# Altium PCB PCB1.PcbDoc
Units mm, origin at the board's own origin, x right, y up, seen from the top; angles counter-clockwise.
Board outline 186.79 x 62.12 mm, 2 copper layers (Top Layer, Bottom Layer); 22 components, 77 nets, 215 pads, 50 vias.
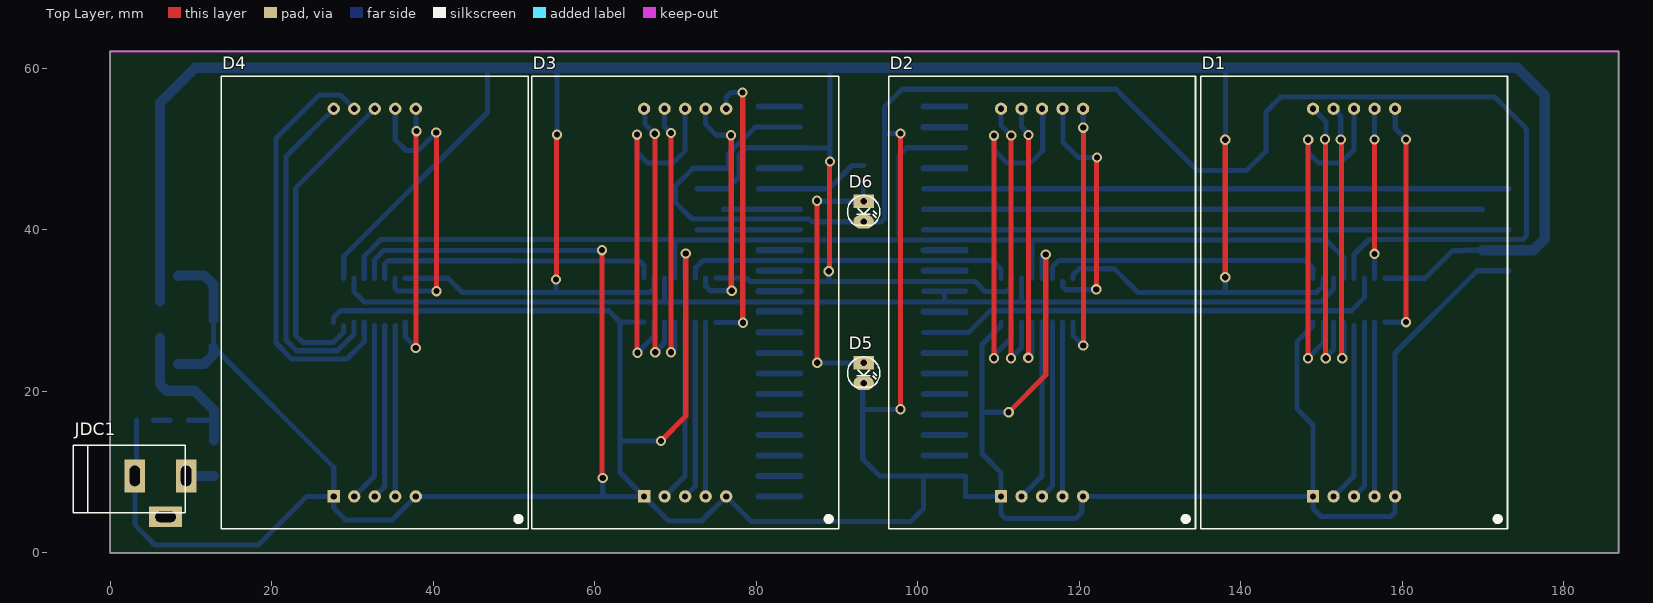
[diagram p0: Top Layer view]
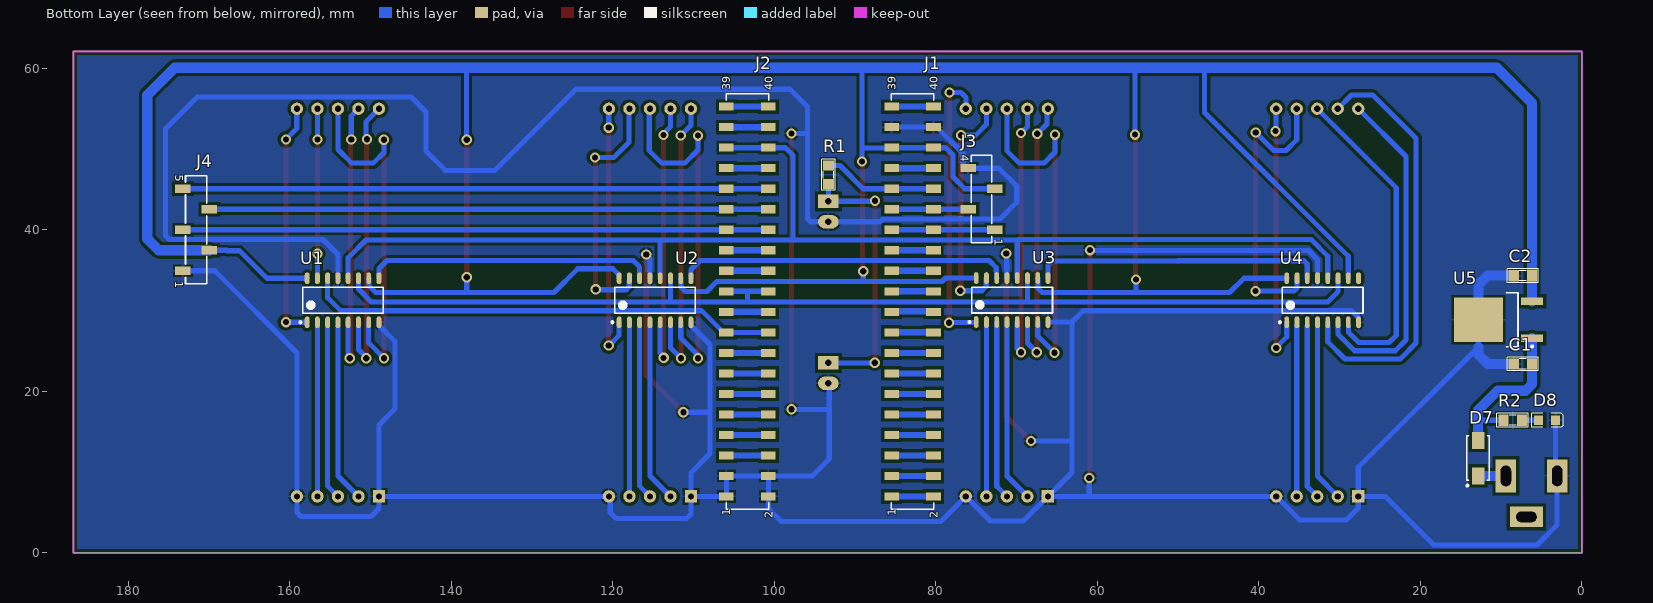
[diagram p1: Bottom Layer view, seen from below]
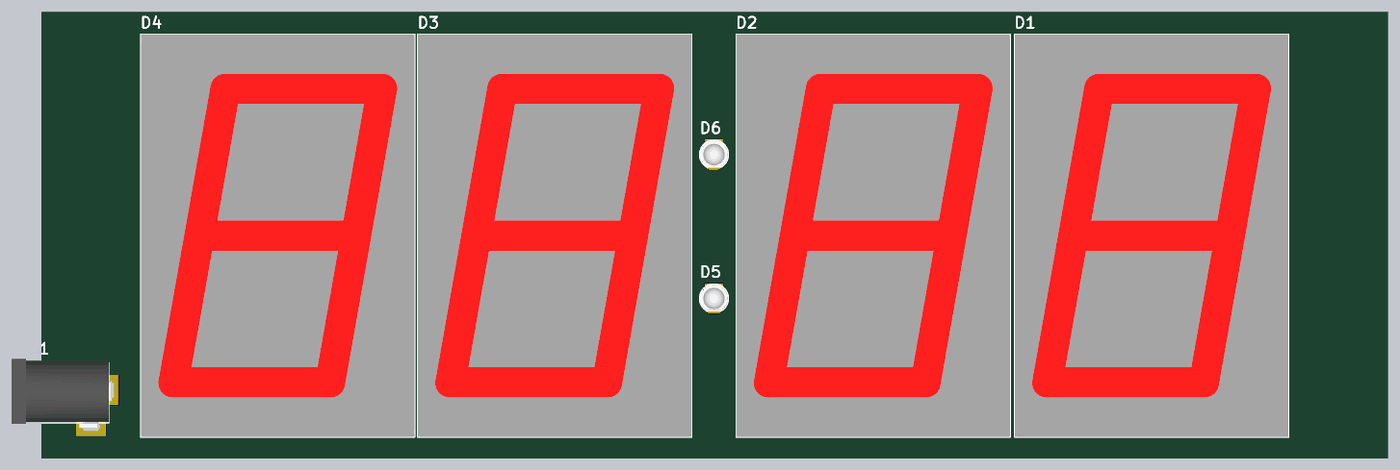
[diagram p2: 3D render of the assembled board from above, using the file's embedded part models]
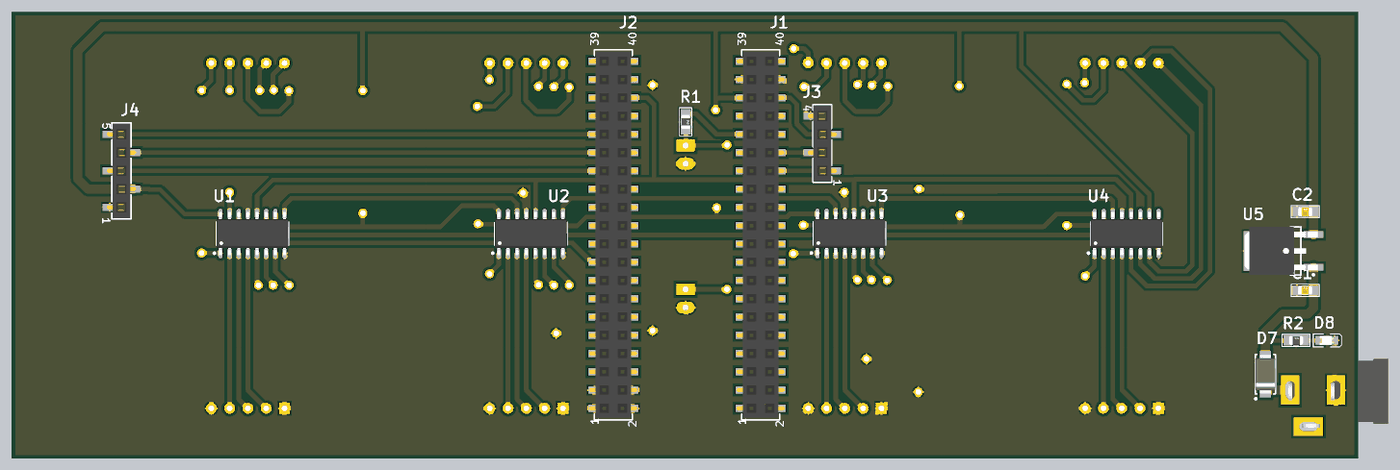
[diagram p3: 3D render of the assembled board from below, using the file's embedded part models]

## Layer stack, top to bottom
Top Solder: solder mask 0.0102, Solder Resist, Dk 3.5
Top Layer: signal copper 0.0356
Dielectric 1: dielectric 0.32, FR-4, Dk 4.8
Bottom Layer: signal copper 0.0356
Bottom Solder: solder mask 0.0102, Solder Resist, Dk 3.5

## Board outline
0,0 186.792,0 186.792,62.115 0,62.115

## Design rules (kind name [scope] priority, off if disabled: settings)
Clearance [All] p1: gap=0.381 ignorepadtopadclearanceinfootprint=FALSE
PolygonConnect [All] p1: connectstyle=Relief reliefconductorwidth=0.254 reliefentries=4 polygonreliefangle="90 Angle" airgapwidth=0.254
RoutingVias [All] p1: holewidth=0.762 width=1.27 viastyle="Through Hole" minholewidth=0.762 minwidth=1.27 maxholewidth=0.762 maxwidth=1.27
SolderMaskExpansion [All] p1: expansion=0.102 istentingtop=FALSE
Width [All] p1: maxlimit=1.27 minlimit=0.508 preferedwidth=0.762
30 further rules are at their usual default settings.

## Classes and differential pairs
component class Power_Supply: C1 C2 D7 D8 JDC1 R2 U5
component class Peripherials: D1 D2 D3 D4 D5 D6 J3 J4 R1 U1 U2 U3 U4
component class MCU: J1 J2

## Components (designator, comment, footprint, x,y, rotation, side; value= is the part's Value field where it differs from the comment)
C1 "Cap Non-Pol SMD" CAP-SM-0805 8.445,23.405 r180 bottom value=0.33uF/16V/0805
C2 "Cap Non-Pol SMD" CAP-SM-0805 8.445,34.327 r180 bottom value=0.1uF/16V/0805
D1 "7-SEGMENT DISPLAY" "7-SEGMENT 1.8INCH" 154.026,31 r0 top
D2 "7-SEGMENT DISPLAY" "7-SEGMENT 1.8INCH" 115.392,31 r0 top
D3 "7-SEGMENT DISPLAY" "7-SEGMENT 1.8INCH" 71.196,31 r0 top
D4 "7-SEGMENT DISPLAY" "7-SEGMENT 1.8INCH" 32.766,31 r0 top
D5 "LED" LED-3mm 93.293,23.54 r270 top
D6 "LED" LED-3mm 93.292,43.54 r270 top
D7 "D Schottky" SS34 12.852,11.737 r90 bottom
D8 "LED SMD" LED_0805_Blue 4.305,16.433 r180 bottom
J1 "61004021821" 61004021821 82.877,31.127 r90 bottom
J2 "61004021821" 61004021821 103.317,31.127 r90 bottom
J3 "61000413321" 61000413321 74.32,43.827 r270 bottom
J4 "61000511921" 61000511921 171.577,40.017 r270 bottom
JDC1 "Jack DC" DC-IN 6.229,6.997 r0 top value="Jac DC"
R1 "RESISTOR SMD" RES-SM-0805 93.269,47.958 r270 bottom value=1K
R2 "RESISTOR SMD" RES-SM-0805 9.702,16.437 r180 bottom value=10K
U1 "74HC595" SOIC-16 157.836,28.562 r90 bottom
U2 "74HC595" SOIC-16 119.202,28.562 r90 bottom
U3 "74HC595" SOIC-16 74.993,28.587 r90 bottom
U4 "74HC595" SOIC-16 36.538,28.562 r90 bottom
U5 "LM78xx" DPAK228P1014X239-3N 10.359,28.872 r0 bottom

## Footprints (in the part's own frame and the unit in brackets; to place one, negate y for a bottom-side part, rotate by r counter-clockwise, add the part's x,y. Pads: shape width x height; smd on the part's side, far side on the other; paste and mask are expansions set on the pad)
"7-SEGMENT 1.8INCH" [mil] "38x56x11mm"
  rect 60x60 hole 30: 1(-200,-944.88)
  round 60 hole 30: 2(-100,-944.88) 3(0,-944.88) 4(100,-944.88) 5(200,-944.88) 6(200,944.88) 7(100,944.88) 8(0,944.88) 9(-100,944.88) 10(-200,944.88)
  silkscreen extent -748,-1102 748,1102, body extent -748,-1102 748,1102, height 476
61000413321 [mm] "Socket Header, Pitch 2.54 mm, SMT, Vertical, single row, 4p"
  rect 1x1.91 smd: 1(3.81,1.645) 2(1.27,-1.645) 3(-1.27,1.645) 4(-3.81,-1.645)
  silkscreen extent -5.41,-1.28 5.41,1.28, body extent -5.33,-2.02 5.33,2.03, height 7.5
61000511921 [mm] "Socket Header, Pitch 2.54 mm, SMT, Vertical, single row, 5p"
  rect 1x1.91 smd: 1(5.08,-1.645) 2(2.54,1.645) 3(0,-1.645) 4(-2.54,1.645) 5(-5.08,-1.645)
  silkscreen extent -6.68,-1.33 6.68,1.33, body extent -6.6,-2.02 6.6,2.03, height 7.5
61004021821 [mm] "Socket Header, Pitch 2.54 mm, SMT, Vertical, dual row, 40p"
  rect 1x1.8 smd: 1(-24.13,2.6) 2(-24.13,-2.6) 3(-21.59,2.6) 4(-21.59,-2.6) 5(-19.05,2.6) 6(-19.05,-2.6) 7(-16.51,2.6) 8(-16.51,-2.6) 9(-13.97,2.6) 10(-13.97,-2.6) 11(-11.43,2.6) 12(-11.43,-2.6) 13(-8.89,2.6) 14(-8.89,-2.6) 15(-6.35,2.6) 16(-6.35,-2.6) 17(-3.81,2.6) 18(-3.81,-2.6) 19(-1.27,2.6) 20(-1.27,-2.6) 21(1.27,2.6) 22(1.27,-2.6) 23(3.81,2.6) 24(3.81,-2.6) 25(6.35,2.6) 26(6.35,-2.6) 27(8.89,2.6) 28(8.89,-2.6) 29(11.43,2.6) 30(11.43,-2.6) 31(13.97,2.6) 32(13.97,-2.6) 33(16.51,2.6) 34(16.51,-2.6) 35(19.05,2.6) 36(19.05,-2.6) 37(21.59,2.6) 38(21.59,-2.6) 39(24.13,2.6) 40(24.13,-2.6)
  silkscreen extent -25.73,-2.62 25.73,2.62, body extent -25.4,-3.35 25.4,3.35, height 7.5
CAP-SM-0805 [mil]
  rect 50x55 smd: 1(0,0) 2(90,0)
  silkscreen extent -32,-34 121,33, body extent 6,-25 84,25, height 31
DC-IN [mil] "Jac DC input"
  rect 100x160 hole 50 slot 100 at 90 deg: 1(125,100) 2(-125,100)
  rect 160x100 hole 50 slot 100 at 0 deg: 3(25,-100)
  silkscreen extent -425,-80 120,250, body extent -410,-105 134,269, height 434
DPAK228P1014X239-3N [mm] "D-PAK, 3-Pads, Body 6.21x6.72mm (max), IPC Medium Density"
  rect 2.7x0.95 smd: 1(-4.2,2.28) 3(-4.2,-2.28)
  rect 6.1x5.55 smd: 2(2.45,0)
  silkscreen extent -4.32,-3.35 -1,3.43, body extent -4.79,-3.35 5.35,3.35, height 2.39
LED-3mm [mil] "LED 2 PIN, 3ly Only colour"
  rect 65x100 hole 32: 1(0,0)
  oval 65x100 hole 32: 2(100,0)
  silkscreen extent -29,-78 118,79, body extent -25,-75 113,75, height 217
LED_0805_Blue [mm] "Chip LED, 2-Leads, Body 2.0x1.3mm, IPC Medium Density"
  rect 1.1x1.2 smd: 1(-1.05,0) 2(1.05,0)
  silkscreen extent -1.91,-0.89 2.03,0.89, body extent -1,-0.63 1,0.62, height 0.68
RES-SM-0805 [mil]
  rect 50x55 smd: 1(0,0) 2(90,0)
  silkscreen extent -32,-34 121,33, body extent 6,-25 84,25, height 31
SOIC-16 [mm]
  oval 1.45x0.6 smd: 1(0,0) 2(0,-1.27) 3(0,-2.54) 4(0,-3.81) 5(0,-5.08) 6(0,-6.35) 7(0,-7.62) 8(0,-8.89) 9(5.45,-8.89) 10(5.45,-7.62) 11(5.45,-6.35) 12(5.45,-5.08) 13(5.45,-3.81) 14(5.45,-2.54) 15(5.45,-1.27) 16(5.45,0)
  silkscreen extent -0.12,-9.45 4.33,0.98, body extent -0.27,-9.45 5.72,0.56, height 1.75
SS34 [mm] "DO-214-AC/SMA Molded Diode, Body 5.3x2.6mm, IPC Medium Density"
  rect 2.1x1.55 smd: A(-2.2,0) K(2.2,0)
  silkscreen extent -3.52,-1.4 2.75,1.45, body extent -2.75,-1.4 2.75,1.4, height 2.3

## Part data
C1 C2: "Capacitor"
D1 D2 D3 D4: library part 7-SEGMENT
D7: "Schottky Diode", Supplier Part Number 1=SS14, Code_JEDEC=DO-214-AA, LatestRevisionDate=17-Jul-2002, LatestRevisionNote="Re-released for DXP Platform.", PackageDescription="DO-214-AA/SMB; 2 C-Bend Leads; Body 5.3 x 3.6 mm, inc. leads (LxW)", PackageReference=SMB, Published=8-Jun-2000, Publisher="Altium Limited", Supplier 1="Arrow Electronics", Supplier 2=RSComponents, Supplier Part Number 2=8080433
D8: "LED"
J1 J2: "WR-PHD Socket Header, SMT, pitch 2.54mm, Dual Row, Vertical, 40p", Contact Resistance=20mOhm, Manufacturer="Wurth Elektronik", Operating Temperature="-40 to +105degC", Rated Current=3A, Withstanding Voltage=600VAC, Working Voltage=250VAC, ComponentLink1Description=Manufacturer, ComponentLink1URL=http://www.we-online.de, ComponentLink2Description=Datasheet, ComponentLink2URL=https://www.we-online.com/catalog/datasheet/61004021821.pdf, Gender="Socket Header", Manufacturer Part Number=61004021821, Mounting Technology=SMT, Orientation=Vertical, Packaging=Tube, Pin Number=40, Pitch=2.54mm, Published Date="May 2020", Row Number=Dual
J3: "WR-PHD Socket Header, SMT, pitch 2.54mm, Single Row, Vertical, 4p", Contact Resistance=20mOhm, Manufacturer="Wurth Elektronik", Operating Temperature="-40 to +125degC", Rated Current=3A, Withstanding Voltage=500VAC, Working Voltage=250VAC, ComponentLink1Description=Manufacturer, ComponentLink1URL=http://www.we-online.de, ComponentLink2Description=Datasheet, ComponentLink2URL=https://www.we-online.com/catalog/datasheet/61000413321.pdf, Gender="Socket Header", Manufacturer Part Number=61000413321, Mounting Technology=SMT, Orientation=Vertical, Packaging=Tube, Pin Number=4, Pitch=2.54mm, Published Date="May 2020", Row Number=Single
J4: "WR-PHD Socket Header, SMT, pitch 2.54mm, Single Row, Vertical, 5p", Contact Resistance=20mOhm, Manufacturer="Wurth Elektronik", Operating Temperature="-40 to +125degC", Rated Current=3A, Withstanding Voltage=500VAC, Working Voltage=250VAC, ComponentLink1Description=Manufacturer, ComponentLink1URL=http://www.we-online.de, ComponentLink2Description=Datasheet, ComponentLink2URL=https://www.we-online.com/catalog/datasheet/61000511921.pdf, Gender="Socket Header", Manufacturer Part Number=61000511921, Mounting Technology=SMT, Orientation=Vertical, Packaging=Tube, Pin Number=5, Pitch=2.54mm, Published Date="May 2020", Row Number=Single
JDC1: "Jack DC input"
R1 R2: "Resistor"
U1 U2 U3 U4: "8-Bit Serial-Input/Serial orParallel-Output ShiftRegister with Latched3-State Outputs"

## Via types
v1: diameter 1.27, hole 0.762, Top Layer to Bottom Layer, 50 vias

## Nets (pads, with @x,y where several pads share a name; then routed paths per layer and width w, separated by ;. In a path a pad name is that pad's centre, name@x,y a point inside that pad or via, vN(x,y) a via of type N, cw(c..) or ccw(c..) an arc to the next point about the centre after c; other vN are vias at no path point)
+5: C2.2 J1.35 J1.36 J3.3 J4.2 U1.10 U1.16 U2.10 U2.16 U3.10 U3.16 U4.10 U4.16 U5.3 | length 480.8
  Top Layer w0.635: v1(55.22,33.861) 55.27,33.911 55.27,51.743 v1(55.32,51.793) ; v1(88.975,34.874) 89.052,34.95 89.052,48.39 v1(89.128,48.466) ; v1(138.074,34.14) v1(138.074,51.158) v1@138.074,51.565
  Bottom Layer w0.635: U4.10 28.918,36.745 46.71,54.537 46.71,60.074 ; U4.16 41.835,34.012 43.611,32.235 55.219,32.235 ; v1(55.22,33.861) 55.219,32.235 ; v1(55.32,51.793) 55.32,60.048 55.346,60.074 ; U3.10 67.356,34.02 67.356,32.765 66.827,32.235 55.219,32.235 ; J3.3 76.412,45.097 77.876,46.561 77.876,49.279 78.774,50.177 J1.36 J1.35 J1.35@85.877,50.177 ; U3.16 78.789,34.037 79.23,33.596 88.975,33.596 ; J1.35@85.877,50.134 88.933,50.134 88.95,50.117 ; v1(88.975,34.874) 88.975,33.596 ; v1(89.128,48.466) 89.128,60.074 ; U2.10 111.565,33.994 111.565,32.921 111.006,32.362 108.339,32.362 107.106,33.596 88.975,33.596 ; U2.16 119.202,34.402 119.982,35.182 124.332,35.182 127.279,32.235 138.074,32.235 ; v1(138.074,34.14) 138.074,32.235 ; v1(138.074,51.158) 138.124,51.209 138.124,60.074 ; U1.10 150.198,33.994 150.198,33.082 149.351,32.235 138.074,32.235 ; U1.16 162.811,34.012 166.217,37.417 167.725,37.417 167.785,37.477 J4.2
  Bottom Layer w1.27: U5.3 C2.2 6.159,55.692 10.541,60.074 46.71,60.074 55.346,60.074 89.128,60.074 138.124,60.074 174.243,60.074 177.621,56.696 177.621,38.889 176.209,37.477 J4.2
DS_2: U1.9 U2.14 | length 35.6
  Bottom Layer w0.635: U2.14 116.662,35.407 117.462,36.207 147.945,36.207 148.946,35.206 U1.9
DS_3: U2.9 U3.14 | length 41
  Bottom Layer w0.635: U3.14 72.471,34.055 72.471,34.904 72.504,34.937 72.504,35.318 73.393,36.207 109.207,36.207 110.312,35.102 U2.9
DS_4: U3.9 U4.14 | length 35.9
  Bottom Layer w0.635: U4.14 33.998,35.788 34.383,36.172 49.968,36.172 49.981,36.16 65.567,36.16 66.103,35.623 U3.9
GND: C1.1 C2.1 D1.1 D1.5 D2.1 D2.5 D3.1 D3.5 D4.1 D4.5 D5.2 D6.2 D8.2 J1.37 J1.38 J2.1 J2.2 J2.3 J2.4 J3.4 J4.1 JDC1.2 U1.8 U1.13 U2.8 U2.13 U3.8 U3.13 U4.8 U4.13 U5.2 | length 758.5
  Top Layer w0.635: v1(60.909,37.493) 60.909,9.35 v1(60.985,9.274) ; v1(68.199,13.871) 71.272,16.945 v1(71.272,37.061) ; v1(97.866,17.783) v1(97.866,51.946) ; v1(111.252,17.427) 115.849,22.025 v1(115.849,36.96)
  Bottom Layer w0.635: D8.2 3.255,9.739 JDC1.2 3.054,3.477 5.537,0.993 18.339,0.993 24.345,7 D4.1 ; U5.2 12.809,25.494 27.686,10.618 D4.1 ; U4.8 27.665,28.579 27.665,29.146 28.504,29.985 61.746,29.985 63.144,28.587 ; U4.13 32.728,36.312 33.858,37.442 60.858,37.442 v1(60.909,37.493) ; v1(60.985,9.274) 60.985,7.025 60.96,7 ; U3.8 63.144,28.587 ; v1(68.199,13.871) 63.144,13.871 ; U3.13 71.201,34.055 71.201,36.99 v1(71.272,37.061) ; J1.37 J1.38 79.877,52.717 76.602,49.442 76.602,47.82 76.42,47.637 J3.4 72.196,47.637 69.977,45.418 69.977,43.411 72.034,41.354 86.528,41.354 86.882,41 95.513,41 95.885,41.372 95.885,51.946 ; D5.2 93.193,20.9 93.193,17.783 ; v1(97.866,17.783) 93.193,17.783 ; v1(97.866,51.946) 95.885,51.946 ; U2.8 110.312,28.172 107.95,25.809 107.95,17.503 ; v1(111.252,17.427) 108.026,17.427 107.95,17.503 ; U2.13 115.392,36.503 v1(115.849,36.96) ; U1.8 148.946,28.172 146.976,26.202 146.976,17.808 148.946,15.839 D1.1 ; U1.13 154.026,36.96 155.884,38.818 174.909,38.818 175.362,39.271 175.362,52.53 171.45,56.442 159.729,56.442 159.711,56.461 144.951,56.461 143.104,54.613 143.104,49.736 140.741,47.374 134.569,47.374 124.536,57.407 98.044,57.407 95.885,55.248 95.885,51.946 ; J4.1 169.275,34.937 159.106,24.768 D1.5 159.106,5.032 158.598,4.524 149.936,4.524 148.946,5.515 D1.1 ; D4.1 27.686,5.565 29.159,4.092 34.938,4.092 D4.5 60.96,7 ; 60.96,7 D3.1 ; 63.144,13.871 63.144,9.972 D3.1 ; 63.144,13.871 63.144,28.587 ; D3.1 69.176,3.94 73.216,3.94 D3.5 79.387,3.889 99.136,3.889 100.717,5.469 J2.2 J2.4 ; 93.193,17.783 93.193,11.636 95.292,9.537 J2.4 ; J2.4 J2.3 J2.1 105.918,6.999 110.311,6.999 D2.1 ; 107.95,17.503 107.95,12.296 110.312,9.934 D2.1 ; D2.1 110.312,4.829 110.896,4.245 119.532,4.245 120.302,5.014 120.302,6.83 D2.5 D1.1
  Bottom Layer w1.27: C1.1 11.642,23.405 12.809,24.572 12.809,25.494 ; C2.1 8.445,34.344 11.684,34.344 12.809,33.218 U5.2
I2C1_SCL: J1.29 J1.30 J3.2 | length 9.5
  Bottom Layer w0.635: J3.2 J1.30 J1.29
I2C1_SDA: J1.27 J1.28 J3.1 | length 12.8
  Bottom Layer w0.635: J3.1 J1.28 J1.27
LATCH: J2.35 J2.36 U1.12 U2.12 U3.12 U4.12 | length 157
  Bottom Layer w0.635: U4.12 31.458,36.745 33.54,38.827 69.825,38.827 69.913,38.738 ; U3.12 69.913,38.738 ; J2.35 101.042,50.177 J2.36 98.611,50.177 97.662,49.228 97.662,38.789 97.637,38.763 ; U2.12 114.122,38.747 ; U1.12 152.756,36.553 150.561,38.747 114.122,38.747 ; 69.913,38.738 69.939,38.763 97.637,38.763 ; 97.637,38.763 104.129,38.763 104.146,38.747 114.122,38.747
LED_BLINK: J1.31 J1.32 R1.1 | length 14.2
  Bottom Layer w0.635: J1.32 J1.31 89.011,45.097 91.872,47.958 R1.1
NetD1_2: D1.2 U1.4 | length 22.2
  Bottom Layer w0.635: D1.2 154.025,9.539 U1.4@154.025,28.154
NetD1_3: D1.3 U1.3 | length 22.1
  Bottom Layer w0.635: D1.3 155.296,8.27 U1.3
NetD1_4: D1.4 U1.2 | length 21.6
  Bottom Layer w0.635: D1.4 U1.2
NetD1_6: D1.6 U1.1 | length 29.6
  Top Layer w0.635: v1@160.451,28.578 v1(160.451,51.184)
  Bottom Layer w0.635: U1.1 157.844,28.57 160.444,28.57 v1(160.452,28.578) ; D1.6 159.118,54.988 159.118,52.545 160.451,51.212 v1(160.451,51.184)
NetD1_7: D1.7 U1.15 | length 21
  Top Layer w0.635: v1(156.566,37.035) v1@156.565,51.082
  Bottom Layer w0.635: U1.15 v1(156.566,37.035) ; v1@156.565,51.083 D1.7
  other v1: 156.565,51.184
NetD1_8: D1.8 U1.7 | length 45.9
  Top Layer w0.635: v1(148.31,24.107) 148.322,24.12 148.322,51.146 v1(148.335,51.158)
  Bottom Layer w0.635: v1(148.31,24.107) 150.216,26.013 U1.7 ; v1(148.335,51.158) 148.335,49.584 149.656,48.263 152.323,48.263 154.026,49.965 D1.8
NetD1_9: D1.9 U1.5 | length 35.7
  Top Layer w0.635: v1@152.374,50.879 152.463,50.79 152.463,24.272 v1@152.552,24.184
  Bottom Layer w0.635: D1.9 152.374,54.112 v1@152.374,50.879 ; v1@152.552,24.184 152.756,24.388 U1.5
  other v1: 152.552,24.107 152.374,51.184
NetD1_10: D1.10 U1.6 | length 36.4
  Top Layer w0.635: v1(150.419,51.232) 150.469,51.181 150.469,24.209 v1@150.52,24.158
  Bottom Layer w0.635: D1.10 150.545,53.401 150.545,52.766 150.54,52.761 150.54,51.353 v1(150.419,51.232) ; v1@150.52,24.158 150.52,24.234 151.486,25.2 U1.6
  other v1: 150.52,24.107
NetD2_2: D2.2 U2.4 | length 22.6
  Bottom Layer w0.635: D2.2 115.392,9.54 U2.4
NetD2_3: D2.3 U2.3 | length 22.2
  Bottom Layer w0.635: D2.3@115.391,7.115 115.507,7.115 116.662,8.27 U2.3 ; D2.3 D2.3@115.392,7.114
NetD2_4: D2.4 U2.2 | length 21.6
  Bottom Layer w0.635: D2.4 U2.2
NetD2_6: D2.6 U2.1 | length 32.8
  Top Layer w0.635: v1(120.497,25.682) 120.522,25.708 120.522,52.632 v1(120.497,52.657)
  Bottom Layer w0.635: U2.1 119.202,26.951 120.471,25.682 v1(120.497,25.682) ; D2.6 120.497,54.975 v1(120.497,52.657)
NetD2_7: D2.7 U2.15 | length 30.5
  Top Layer w0.635: v1(122.098,32.639) 122.148,32.689 122.148,48.924 v1(122.199,48.974)
  Bottom Layer w0.635: D2.7 117.982,54.95 117.982,50.853 119.862,48.974 v1(122.199,48.974) ; U2.15@117.95,33.604 117.95,32.96 118.322,32.588 122.047,32.588 v1(122.098,32.639)
NetD2_8: D2.8 U2.7 | length 47.2
  Top Layer w0.635: v1(109.448,24.107) v1(109.448,51.666)
  Bottom Layer w0.635: v1(109.448,24.107) 109.448,24.488 111.582,26.623 U2.7 ; v1(109.448,51.666) 109.448,49.888 111.073,48.263 113.918,48.263 115.468,49.812 115.468,54.925 D2.8
NetD2_9: D2.9 U2.5 | length 35.8
  Top Layer w0.635: v1(113.69,24.155) 113.716,24.181 v1(113.716,51.74)
  Bottom Layer w0.635: D2.9 112.852,52.775 113.716,51.912 v1(113.716,51.74) ; v1(113.69,24.155) 113.69,24.327 114.122,24.759 U2.5
NetD2_10: D2.10 U2.6 | length 36.4
  Top Layer w0.635: v1(111.556,24.107) 111.556,51.666 v1(111.581,51.692)
  Bottom Layer w0.635: D2.10 110.312,52.961 v1(111.581,51.692) ; v1(111.556,24.107) 112.852,25.404 U2.6
NetD3_2: D3.2 U3.4 | length 22.6
  Bottom Layer w0.635: D3.2 71.183,9.527 U3.4
NetD3_3: D3.3 U3.3 | length 22.1
  Bottom Layer w0.635: D3.3 72.453,8.257 U3.3
NetD3_4: D3.4 U3.2 | length 21.6
  Bottom Layer w0.635: D3.4 U3.2@73.736,28.587
NetD3_6: D3.6 U3.1 | length 35.6
  Top Layer w0.635: v1(78.283,57) 78.321,56.962 78.321,28.54 v1(78.359,28.502)
  Bottom Layer w0.635: U3.1 74.993,28.562 75.011,28.544 78.316,28.544 v1(78.359,28.502) ; D3.6 76.251,55.025 76.251,56.391 76.86,57 v1(78.283,57)
NetD3_7: D3.7 U3.15 | length 29.4
  Top Layer w0.635: v1(76.86,51.717) 76.91,51.666 76.91,32.515 v1(76.961,32.464)
  Bottom Layer w0.635: U3.15@73.73,34.043 U3.15 73.741,34.02 73.741,33.017 74.294,32.464 v1(76.961,32.464) ; D3.7 73.736,53.038 75.057,51.717 v1(76.86,51.717)
NetD3_8: D3.8 U3.7 | length 46.2
  Top Layer w0.635: v1(65.226,51.793) 65.226,24.869 v1(65.303,24.793)
  Bottom Layer w0.635: v1(65.226,51.793) 65.226,49.634 66.598,48.263 69.671,48.263 71.196,49.788 D3.8 ; v1(65.303,24.793) 67.373,26.864 U3.7
NetD3_9: D3.9 U3.5 | length 34.4
  Top Layer w0.635: v1(69.443,24.844) v1(69.443,51.997)
  Bottom Layer w0.635: D3.9 68.655,52.784 v1(69.443,51.997) ; v1(69.443,24.844) 69.913,25.315 U3.5
NetD3_10: D3.10 U3.6 | length 34.9
  Top Layer w0.635: v1(67.436,51.895) 67.462,51.87 67.462,24.869 v1(67.487,24.844)
  Bottom Layer w0.635: D3.10 66.218,54.899 66.218,53.114 v1(67.436,51.895) ; v1(67.487,24.844) 68.643,26 U3.6
NetD4_2: D4.2 U4.4 | length 22.2
  Bottom Layer w0.635: D4.2 32.745,9.519 U4.4@32.745,28.154
NetD4_3: D4.3 U4.3 | length 21.7
  Bottom Layer w0.635: D4.3 33.998,8.232 U4.3@33.998,28.154
NetD4_4: D4.4 U4.2 | length 21.2
  Bottom Layer w0.635: U4.2@35.285,28.154 35.306,28.134 D4.4
NetD4_6: D4.6 U4.1 | length 33.4
  Top Layer w0.635: v1(37.845,25.377) 37.883,25.415 37.883,52.187 v1(37.921,52.225)
  Bottom Layer w0.635: U4.1 36.538,26.764 37.845,25.457 v1(37.845,25.377) ; D4.6 37.884,54.962 37.884,52.263 v1(37.921,52.225)
NetD4_7: D4.7 U4.15 | length 36.6
  Top Layer w0.635: v1(40.385,52.073) 40.385,32.439 v1(40.411,32.413)
  Bottom Layer w0.635: U4.15 35.285,33.994 35.285,32.785 35.657,32.413 v1(40.411,32.413) ; D4.7 35.306,51.158 36.626,49.838 38.15,49.838 v1(40.385,52.073)
NetD4_8: D4.8 U4.7 | length 39.8
  Bottom Layer w0.635: U4.7@28.9,28.154 28.9,27.329 27.618,26.047 23.863,26.047 22.974,26.936 22.974,45.208 D4.8
NetD4_9: D4.9 U4.5 | length 53
  Bottom Layer w0.635: D4.9 28.533,56.693 25.883,56.693 20.523,51.333 20.523,25.984 22.492,24.015 29.32,24.015 31.458,26.153 U4.5
NetD4_10: D4.10 U4.6 | length 42.4
  Bottom Layer w0.635: D4.10 21.768,49.082 21.768,26.364 23.101,25.031 28.152,25.031 30.2,27.079 U4.6@30.2,28.562
NetD5_1: D5.1 D6.1 R1.2 | length 33.8
  Top Layer w0.635: v1(87.528,43.615) 87.541,43.602 87.541,23.561 v1(87.554,23.549)
  Bottom Layer w0.635: v1(87.528,43.615) 87.603,43.54 D6.1 93.269,43.563 R1.2 ; v1(87.554,23.549) 87.562,23.54 D5.1
NetD7_A: D7.A JDC1.1 | length 3.4
  Bottom Layer w1.27: JDC1.1 D7.A
NetD8_1: D8.1 R2.2 | length 2.1
  Bottom Layer w0.635: D8.1 5.357,16.435 7.414,16.435 R2.2
NetJ1_1: J1.1 J1.2 | length 5.2
  Bottom Layer w0.762: J1.2 J1.1
NetJ1_3: J1.3 J1.4 | length 5.2
  Bottom Layer w0.762: J1.4 J1.3
NetJ1_5: J1.5 J1.6 | length 5.2
  Bottom Layer w0.762: J1.6 J1.5
NetJ1_7: J1.7 J1.8 | length 5.2
  Bottom Layer w0.762: J1.8 J1.7
NetJ1_9: J1.9 J1.10 | length 5.2
  Bottom Layer w0.762: J1.10 J1.9
NetJ1_11: J1.11 J1.12 | length 5.2
  Bottom Layer w0.762: J1.12 J1.11
NetJ1_13: J1.13 J1.14 | length 5.2
  Bottom Layer w0.762: J1.14 J1.13
NetJ1_15: J1.15 J1.16 | length 5.2
  Bottom Layer w0.762: J1.16 J1.15
NetJ1_17: J1.17 J1.18 | length 5.2
  Bottom Layer w0.762: J1.18 J1.17
NetJ1_19: J1.19 J1.20 | length 5.3
  Bottom Layer w0.762: J1.20 80.344,29.924 85.41,29.924 J1.19
NetJ1_21: J1.21 J1.22 | length 5.2
  Bottom Layer w0.762: J1.22 J1.21
NetJ1_23: J1.23 J1.24 | length 5.2
  Bottom Layer w0.762: J1.24 J1.23
NetJ1_25: J1.25 J1.26 | length 5.2
  Bottom Layer w0.762: J1.26 J1.25
NetJ1_33: J1.33 J1.34 | length 5.2
  Bottom Layer w0.762: J1.34 J1.33
NetJ1_39: J1.39 J1.40 | length 5.2
  Bottom Layer w0.762: J1.40 J1.39
NetJ2_5: J2.5 J2.6 | length 5.2
  Bottom Layer w0.762: J2.6 J2.5
NetJ2_7: J2.7 J2.8 | length 5.2
  Bottom Layer w0.762: J2.8 J2.7
NetJ2_9: J2.9 J2.10 | length 5.2
  Bottom Layer w0.762: J2.10 J2.9
NetJ2_11: J2.11 J2.12 | length 5.2
  Bottom Layer w0.762: J2.12 J2.11
NetJ2_13: J2.13 J2.14 | length 5.2
  Bottom Layer w0.762: J2.14 J2.13
NetJ2_15: J2.15 J2.16 | length 5.2
  Bottom Layer w0.762: J2.16 J2.15
NetJ2_19: J2.19 J2.20 | length 5.2
  Bottom Layer w0.762: J2.20 J2.19
NetJ2_23: J2.23 J2.24 | length 5.2
  Bottom Layer w0.762: J2.24 J2.23
NetJ2_25: J2.25 J2.26 | length 5.2
  Bottom Layer w0.762: J2.26 J2.25
NetJ2_33: J2.33 J2.34 | length 5.2
  Bottom Layer w0.762: J2.34 J2.33
NetJ2_37: J2.37 J2.38 | length 5.2
  Bottom Layer w0.762: J2.38 J2.37
NetJ2_39: J2.39 J2.40 | length 5.2
  Bottom Layer w0.762: J2.40 J2.39
SPI1_CLK: J2.21 J2.22 U1.11 U2.11 U3.11 U4.11 | length 137.9
  Bottom Layer w0.635: U4.11 30.188,32.349 31.461,31.076 68.694,31.076 ; U3.11 68.643,31.127 68.694,31.076 ; J2.22 103.317,32.397 ; J2.21 103.317,32.397 ; U2.11 112.852,31.114 112.89,31.076 ; U1.11 151.486,32.668 149.894,31.076 112.89,31.076 ; 68.694,31.076 103.317,31.076 ; 103.317,31.076 103.317,32.397 ; 103.317,31.076 112.89,31.076
SPI1_MOSI: J2.17 J2.18 U1.14 | length 58.8
  Bottom Layer w0.635: J2.18 J2.17 106.317,27.317 108.985,29.985 153.68,29.985 155.295,31.6 U1.14@155.295,34.011
SW_PIN: J2.27 J2.28 J4.3 | length 72.5
  Bottom Layer w0.635: J2.28 J2.27 J4.3
TIM2_CH1: J2.31 J2.32 J4.5 | length 72.5
  Bottom Layer w0.635: J2.32 J2.31 J4.5
TIM2_CH2: J2.29 J2.30 J4.4 | length 69.2
  Bottom Layer w0.635: J2.30 J2.29 J4.4
VCC: C1.2 D7.K R2.1 U5.1 | length 20.6
  Bottom Layer w0.635: R2.1 12.852,16.437
  Bottom Layer w1.27: U5.1 C1.2 6.159,20.913 6.978,20.094 10.439,20.094 12.852,17.681 12.852,16.437 D7.K
pads on no net: JDC1.3 U4.9

## Polygon pours and split planes (outlines as drawn)
GND on Bottom Layer "GND_L02_P000" (solid, remove dead copper, pour order 0): 0,0 186.792,0 186.792,62.115 0,62.115

## Keep-outs
Keep-Out Layer:
  lines w0.254: 0,0 47.651,0 138.938,0 186.792,0 186.792,62.115 148.069,62.115 0,62.115 0,0

## Text inside footprints (layer, text, board x,y; h text height)
J1: Bottom Overlay "1" at 84.977,4.617 h1.02 r270; Bottom Overlay "2" at 79.727,4.267 h1.02 r270; Bottom Overlay "39" at 84.977,57.287 h1.02 r270; Bottom Overlay "40" at 79.727,57.287 h1.02 r270
J2: Bottom Overlay "1" at 105.417,4.617 h1.02 r270; Bottom Overlay "2" at 100.167,4.267 h1.02 r270; Bottom Overlay "39" at 105.417,57.287 h1.02 r270; Bottom Overlay "40" at 100.167,57.287 h1.02 r270
J3: Bottom Overlay "1" at 72.72,38.927 h1.02 r90; Bottom Overlay "4" at 76.92,49.327 h1.02 r90
J4: Bottom Overlay "5" at 174.177,46.817 h1.02 r90; Bottom Overlay "1" at 174.177,33.647 h1.02 r90